# Altium PCB Pico_Audio_Lab.PcbDoc
Units mil, origin at the board's own origin, x right, y up, seen from the top; angles counter-clockwise.
Board outline 3937.01 x 3937.01 mil, 2 copper layers (Top Layer, Bottom Layer), stack 62.086 mil thick; 132 components, 99 nets, 405 pads, 66 vias.
Unrouted connection lines stored in the file: 46.
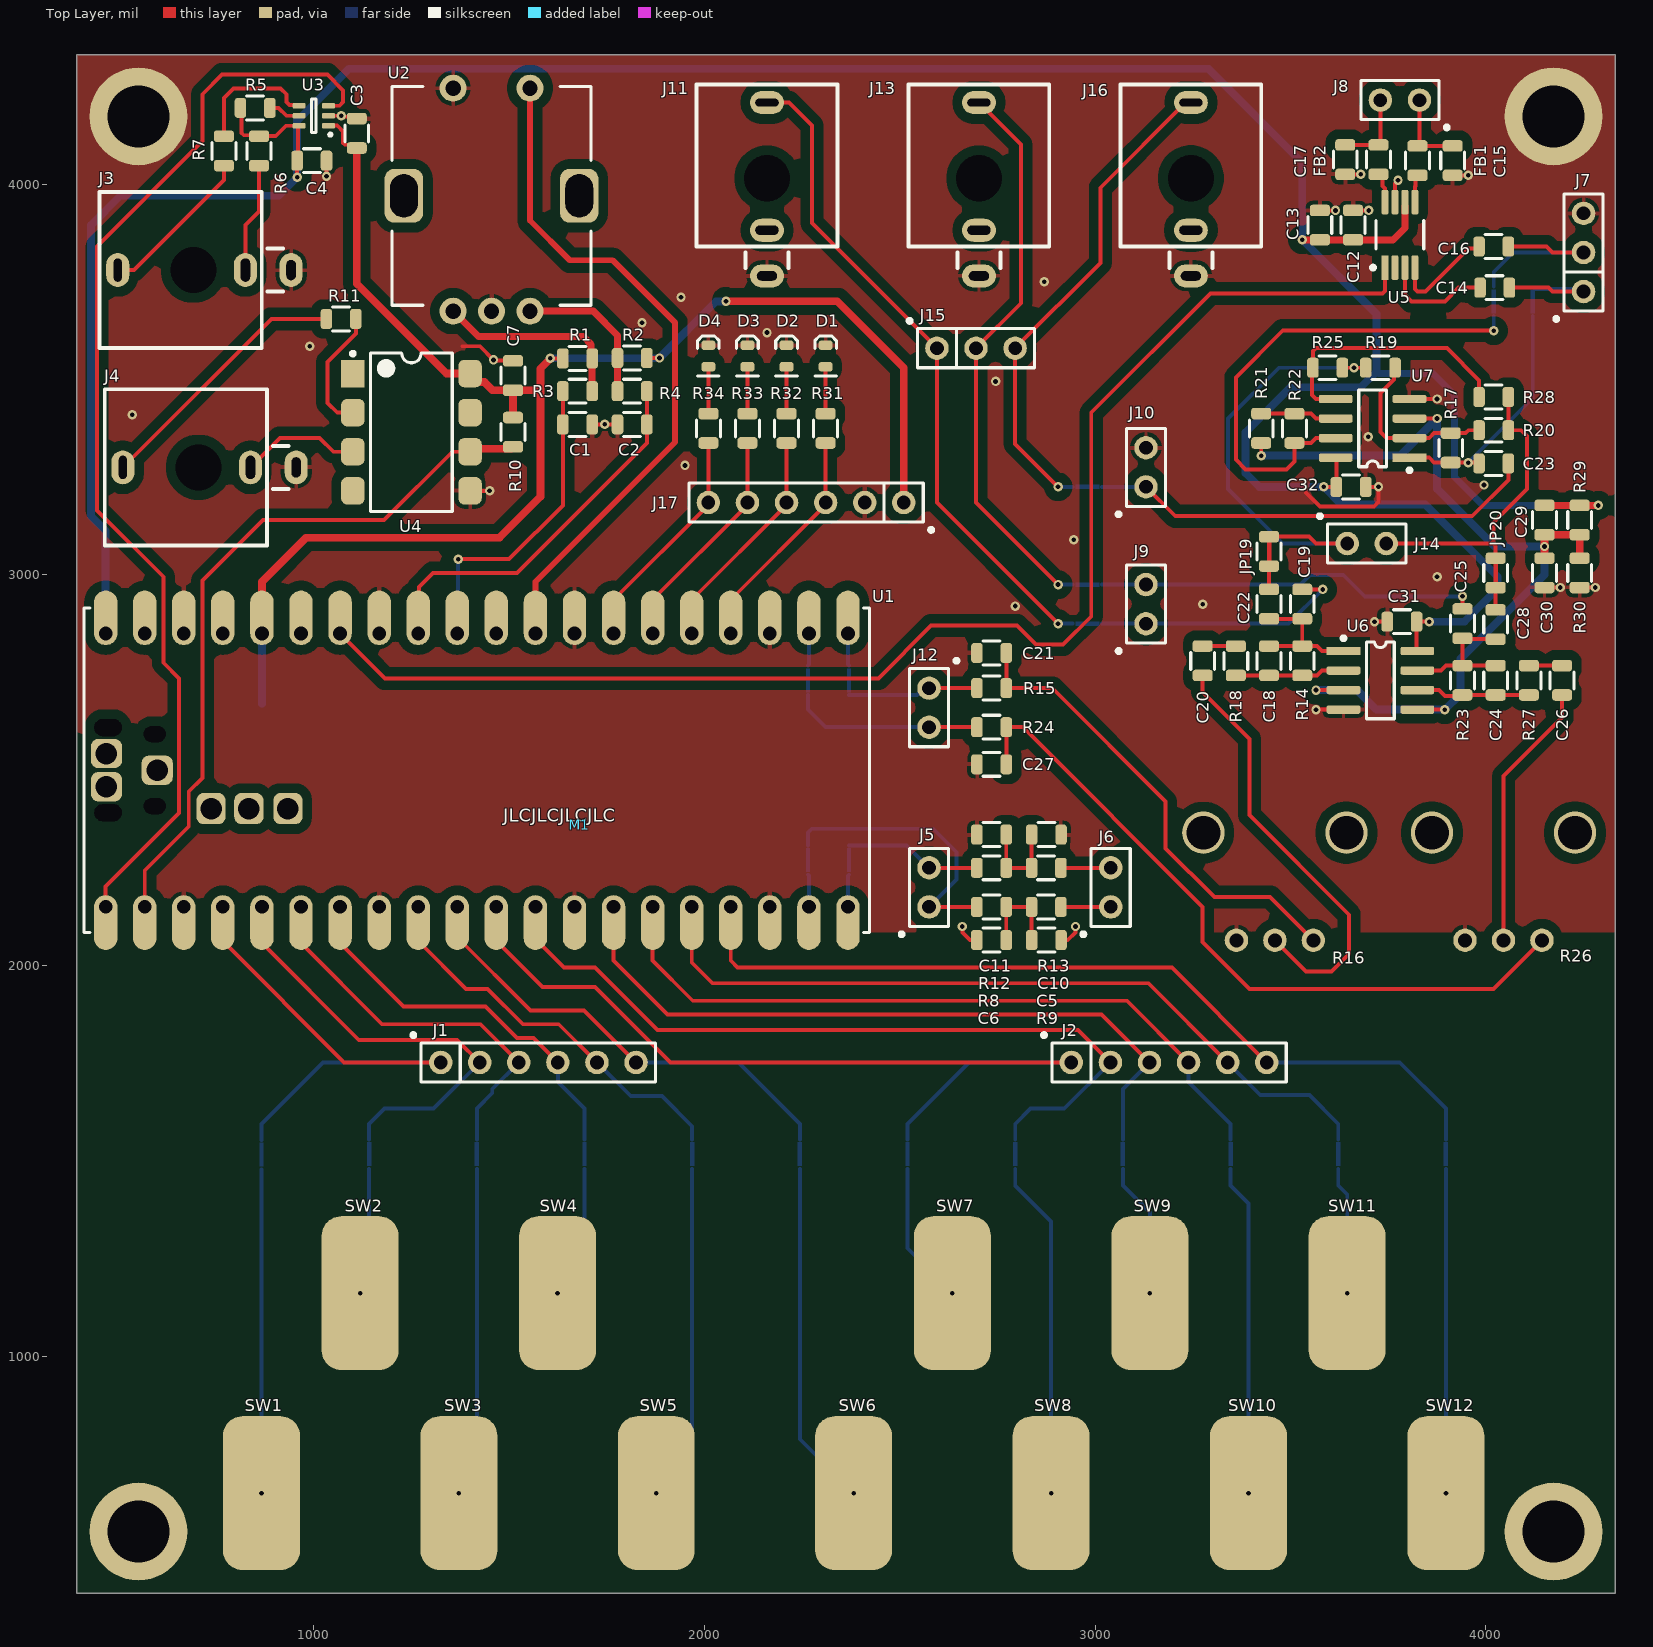
[diagram p0: Top Layer view]
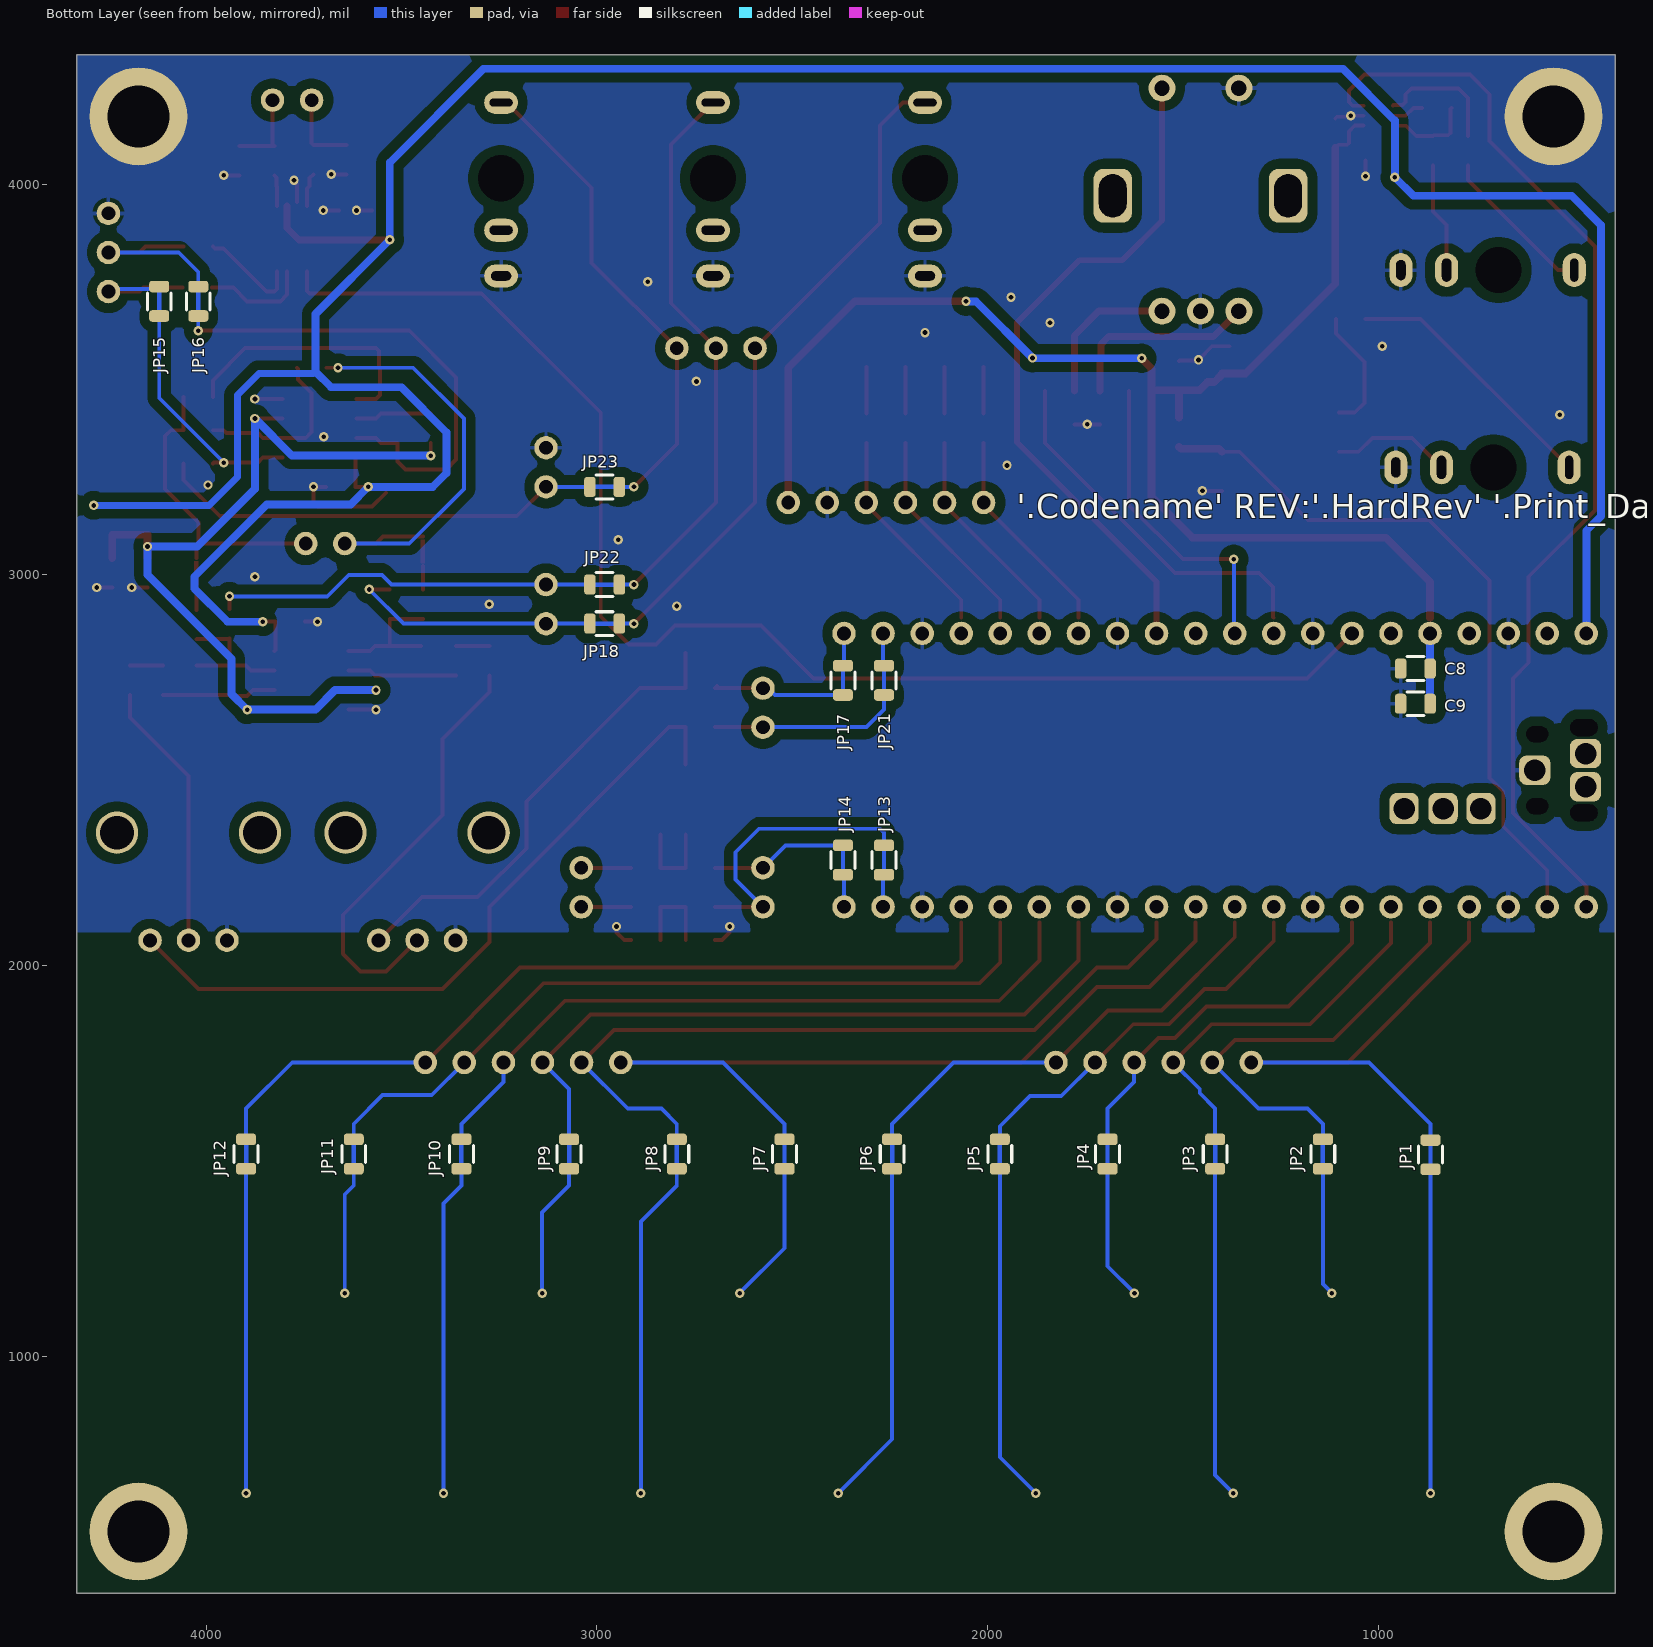
[diagram p1: Bottom Layer view, seen from below]

## Layer stack, top to bottom
Top Solder: solder mask 0.4, Solder Resist, Dk 3.5
Top Layer: signal copper 1.4
Dielectric 1: dielectric 59.2858, FR-4, Dk 4.8
Bottom Layer: signal copper 1.4
Bottom Solder: solder mask 0.4, Solder Resist, Dk 3.5

## Board outline
393.7,393.7 393.7,4330.71 4330.71,4330.71 4330.71,393.7

## Design rules (kind name [scope] priority, off if disabled: settings)
Clearance Clearance_HS [InDifferentialPairClass('DIFF90') vs InPoly] p1: gap=75 ignorepadtopadclearanceinfootprint=FALSE
Clearance Clearance_Poly [All vs InPoly] p2: gap=25 ignorepadtopadclearanceinfootprint=FALSE
Clearance [All] p3: gap=5 ignorepadtopadclearanceinfootprint=FALSE
DiffPairsRouting DIff90 [InDifferentialPairClass('DIFF90')] p1: maxlimit=10 minlimit=7 mostfreqgap=7 toplayer_minwidth=15 toplayer_maxwidth=25 toplayer_prefwidth=25 bottomlayer_minwidth=15 bottomlayer_maxwidth=25 bottomlayer_prefwidth=25 maxuncoupledlength=75
DiffPairsRouting [All] p2: maxlimit=10 minlimit=10 mostfreqgap=10 toplayer_minwidth=15 toplayer_maxwidth=15 toplayer_prefwidth=15 bottomlayer_minwidth=15 bottomlayer_maxwidth=15 bottomlayer_prefwidth=15 maxuncoupledlength=500
Height [All] p1: minheight=0 maxheight=35835.32 prefheight=0
HoleSize [All] p1: absolutevalues=TRUE maxlimit=99999 minlimit=1 maxpercent=80.000 minpercent=20.000
MinimumSolderMaskSliver [All] p1: minsoldermaskwidth=1.8
PolygonConnect [InAnyComponent] p1: thpad.connectstyle=Relief thpad.reliefconductorwidth=10 thpad.reliefentries=4 thpad.polygonreliefangle="90 Angle" thpad.airgapwidth=10 smdpad.connectstyle=Relief smdpad.reliefconductorwidth=10 smdpad.reliefentries=4 smdpad.polygonreliefangle="90 Angle" smdpad.airgapwidth=10 via.connectstyle=Direct via.reliefconductorwidth=10 via.reliefentries=4 via.polygonreliefangle="90 Angle" via.airgapwidth=10
PolygonConnect "Fall through" [All] p2: connectstyle=Direct reliefconductorwidth=10 reliefentries=4 polygonreliefangle="90 Angle" airgapwidth=10
RoutingVias [All] p1: holewidth=28 width=50 viastyle="Through Hole" minholewidth=28 minwidth=50 maxholewidth=28 maxwidth=50
SilkToSilkClearance [All] p1: silktosilkclearance=0
SilkToSolderMaskClearance [IsPad] p1: minsilkscreentomaskgap=0 clearancetoexposedcopper=TRUE
SolderMaskExpansion [All] p1: expansion=2 istentingtop=FALSE
Width [All] p1: maxlimit=300 minlimit=8 preferedwidth=10
24 further rules are at their usual default settings.

## Components (designator, comment, footprint, x,y, rotation, side; value= is the part's Value field where it differs from the comment)
C1 "10000pF" Chip0805 1675,3385 r180 top
C2 "10000pF" Chip0805 1815,3385 r0 top
C3 "0.1µF" Chip0805 1110,4130 r270 top
C4 "0.1µF" Chip0805 995,4060 r180 top
C5 "10µF" Chip0805 2874.72,2150 r0 top
C6 "0.033µF" Chip0805 2734.72,2065 r0 top
C7 "0.1µF" Chip0805 1510,3510 r270 top
C8 "0.1µF" Chip0805 905,2760 r180 bottom
C9 "10µF" Chip0805 905,2670 r180 bottom
C10 "10µF" Chip0805 2874.72,2250 r0 top
C11 "0.033µF" Chip0805 2734.72,2335 r0 top
C12 "1.0µF" Chip0805 3660,3895 r270 top
C13 "10µF" Chip0805 3575,3895 r270 top
C14 "0.1µF" Chip0805 4022.6,3735 r0 top
C15 "220pF" Chip0805 3915,4060 r90 top
C16 "0.1µF" Chip0805 4020,3840 r0 top
C17 "220pF" Chip0805 3640,4062.6 r90 top
C18 "10000pF" Chip0805 3445,2780 r270 top
C19 "0.1µF" Chip0805 3530,2925 r270 top
C20 "0.1µF" Chip0805 3275,2780 r270 top
C21 "0.033µF" Chip0805 2735,2800 r0 top
C22 "0.1µF" Chip0805 3445,2925 r270 top
C23 "0.1µF" Chip0805 4020,3285 r180 top
C24 "10000pF" Chip0805 4025,2730 r270 top
C25 "0.1µF" Chip0805 3940,2875 r270 top
C26 "0.1µF" Chip0805 4195,2730 r270 top
C27 "0.033µF" Chip0805 2735,2515 r0 top
C28 "0.1µF" Chip0805 4025,2872.6 r270 top
C29 "0.1µF" Chip0805 4150,3140 r270 top
C30 "0.1µF" Chip0805 4150,3005 r270 top
C31 "0.1µF" Chip0805 3785,2880 r180 top
C32 "0.1µF" Chip0805 3655,3225 r0 top
D1 "RED" LED0603 2310,3560 r90 top
D2 "RED" LED0603 2210,3560 r90 top
D3 "RED" LED0603 2110,3560 r90 top
D4 "RED" LED0603 2010,3560 r90 top
FB1 "FERRITE" Chip0805 3825,4060 r90 top
FB2 "FERRITE" Chip0805 3725,4062.6 r90 top
J1 "HEADER_1x6_NO_BOM" HEADER_1x6_100mil_NP 1574.8,1751.97 r0 top
J2 "HEADER_1x6_NO_BOM" HEADER_1x6_100mil_NP 3188.98,1751.97 r0 top
J3 "WQP-WQP419GR" PJ366ST 691.93,3780 r90 top
J4 "WQP-WQP419GR" PJ366ST 705,3275 r90 top
J5 "HEADER_1x2_NO_BOM" HEADER_1x2_100mil_NP 2574.72,2200 r90 top
J6 "HEADER_1x2_NO_BOM" HEADER_1x2_100mil_NP 3039.72,2200 r90 top
J7 "HEADER_1x3_NO_BOM" HEADER_1x3_100mil_NP 4250,3825 r90 top
J8 "HEADER_1x2_NO_BOM" HEADER_1x2_100mil_NP 3780,4215 r180 top
J9 "HEADER_1x2_NO_BOM" HEADER_1x2_100mil_NP 3130,2925 r90 top
J10 "HEADER_1x2_NO_BOM" HEADER_1x2_100mil_NP 3130,3275 r90 top
J11 "WQP-WQP518MA" PJ301M-12 2160,4015 r0 top
J12 "HEADER_1x2_NO_BOM" HEADER_1x2_100mil_NP 2574.72,2660 r270 top
J13 "WQP-WQP518MA" PJ301M-12 2702.5,4015 r0 top
J14 "HEADER_1x2_NO_BOM" HEADER_1x2_100mil_NP 3695,3080 r0 top
J15 "HEADER_1x3_NO_BOM" HEADER_1x3_100mil_NP 2695,3580 r0 top
J16 "WQP-WQP518MA" PJ301M-12 3245,4015 r0 top
J17 "HEADER_1x6_NO_BOM" HEADER_1x6_100mil_NP 2260,3185 r180 top
JP1 "JUMMPER_NC_0805" JUMMPER_NC_0805 866.14,1515.75 r270 bottom net-tie
JP2 "JUMMPER_NC_0805" JUMMPER_NC_0805 1141.73,1517.52 r270 bottom net-tie
JP3 "JUMMPER_NC_0805" JUMMPER_NC_0805 1417.32,1517.52 r270 bottom net-tie
JP4 "JUMMPER_NC_0805" JUMMPER_NC_0805 1692.91,1517.52 r270 bottom net-tie
JP5 "JUMMPER_NC_0805" JUMMPER_NC_0805 1968.5,1517.52 r270 bottom net-tie
JP6 "JUMMPER_NC_0805" JUMMPER_NC_0805 2244.09,1517.52 r270 bottom net-tie
JP7 "JUMMPER_NC_0805" JUMMPER_NC_0805 2519.68,1517.52 r270 bottom net-tie
JP8 "JUMMPER_NC_0805" JUMMPER_NC_0805 2795.28,1517.52 r270 bottom net-tie
JP9 "JUMMPER_NC_0805" JUMMPER_NC_0805 3070.87,1517.52 r270 bottom net-tie
JP10 "JUMMPER_NC_0805" JUMMPER_NC_0805 3346.46,1517.52 r270 bottom net-tie
JP11 "JUMMPER_NC_0805" JUMMPER_NC_0805 3622.05,1517.52 r270 bottom net-tie
JP12 "JUMMPER_NC_0805" JUMMPER_NC_0805 3897.64,1517.52 r270 bottom net-tie
JP13 "JUMMPER_NC_0805" JUMMPER_NC_0805 2265,2270 r90 bottom net-tie
JP14 "JUMMPER_NC_0805" JUMMPER_NC_0805 2370,2270 r90 bottom net-tie
JP15 "JUMMPER_NC_0805" JUMMPER_NC_0805 4120,3700 r90 bottom net-tie
JP16 "JUMMPER_NC_0805" JUMMPER_NC_0805 4020,3700 r90 bottom net-tie
JP17 "JUMMPER_NC_0805" JUMMPER_NC_0805 2370,2730 r270 bottom net-tie
JP18 "JUMMPER_NC_0805" JUMMPER_NC_0805 2980,2875 r180 bottom net-tie
JP19 "JUMMPER_NC_0805" JUMMPER_NC_0805 3445,3060 r90 top net-tie
JP20 "JUMMPER_NC_0805" JUMMPER_NC_0805 4025,3005 r90 top net-tie
JP21 "JUMMPER_NC_0805" JUMMPER_NC_0805 2265,2730 r270 bottom net-tie
JP22 "JUMMPER_NC_0805" JUMMPER_NC_0805 2980,2975 r180 bottom net-tie
JP23 "JUMMPER_NC_0805" JUMMPER_NC_0805 2980,3225 r180 bottom net-tie
M1 "JLC_NUMBER" JLC_NUMBER 1680,2360 r0 top
R1 "10k" Chip0805 1675.2,3553.9 r180 top
R2 "10k" Chip0805 1815,3555 r0 top
R3 "10k" Chip0805 1675,3470 r180 top
R4 "10k" Chip0805 1815,3470 r0 top
R5 "2.2k" Chip0805 850,4195 r180 top
R6 "220" Chip0805 860,4085 r90 top
R7 "220" Chip0805 770,4085 r270 top
R8 "270" Chip0805 2734.72,2150 r0 top
R9 "150" Chip0805 2875,2065 r180 top
R10 "2.2k" Chip0805 1510,3365 r90 top
R11 "220" Chip0805 1070,3655 r0 top
R12 "270" Chip0805 2734.72,2250 r0 top
R13 "150" Chip0805 2875,2335 r180 top
R14 "10k" Chip0805 3530,2780 r270 top
R15 "270" Chip0805 2735,2710 r0 top
R16 "100K" Alpha_RD901F-40-15R 3460,2340 r0 top
R17 "10k" Chip0805 3910,3325 r90 top
R18 "10k" Chip0805 3360,2780 r90 top
R19 "10k" Chip0805 3730,3530 r180 top
R20 "10k" Chip0805 4020,3370 r0 top
R21 "10k" Chip0805 3425,3375 r270 top
R22 "10k" Chip0805 3510,3375 r90 top
R23 "10k" Chip0805 3940,2730 r270 top
R24 "270" Chip0805 2735,2610 r0 top
R25 "10k" Chip0805 3595,3530 r0 top
R26 "100K" Alpha_RD901F-40-15R 4045,2340 r0 top
R27 "10k" Chip0805 4110,2730 r90 top
R28 "10k" Chip0805 4020,3455 r0 top
R29 "10k" Chip0805 4240,3140 r270 top
R30 "10k" Chip0805 4240,3005 r270 top
R31 "1k" Chip0805 2310,3375 r270 top
R32 "1k" Chip0805 2210,3375 r270 top
R33 "1k" Chip0805 2110,3375 r270 top
R34 "1k" Chip0805 2010,3375 r270 top
SW1 "TOUCH_PAD_NO_BOM" TENTED_PAD_5mil 866.14,649.61 r90 top
SW2 "TOUCH_PAD_NO_BOM" TENTED_PAD_5mil 1118.77,1161.42 r90 top
SW3 "TOUCH_PAD_NO_BOM" TENTED_PAD_5mil 1371.39,649.61 r90 top
SW4 "TOUCH_PAD_NO_BOM" TENTED_PAD_5mil 1624.02,1161.42 r90 top
SW5 "TOUCH_PAD_NO_BOM" TENTED_PAD_5mil 1876.64,649.61 r90 top
SW6 "TOUCH_PAD_NO_BOM" TENTED_PAD_5mil 2381.89,649.61 r90 top
SW7 "TOUCH_PAD_NO_BOM" TENTED_PAD_5mil 2634.51,1161.42 r90 top
SW8 "TOUCH_PAD_NO_BOM" TENTED_PAD_5mil 2887.14,649.61 r90 top
SW9 "TOUCH_PAD_NO_BOM" TENTED_PAD_5mil 3139.76,1161.42 r90 top
SW10 "TOUCH_PAD_NO_BOM" TENTED_PAD_5mil 3392.39,649.61 r90 top
SW11 "TOUCH_PAD_NO_BOM" TENTED_PAD_5mil 3645.01,1161.42 r90 top
SW12 "TOUCH_PAD_NO_BOM" TENTED_PAD_5mil 3897.64,649.61 r90 top
U1 "Raspberry Pi Pico" RASPBERRY_PI_PICO 1417.32,2500 r90 top
U2 "PEC11R-4020F-S0012" BOURNS_PEC11R-4020F-S 1455,3970 r0 top
U3 "TXU0101DCKR" 6-TSSOP 1000,4175 r180 top
U4 "6N138S" 6N13XS 1250,3365 r0 top
U5 "PAM8302AASCR" 8-MSOP 3780,3870 r90 top
U6 "TL072CDR" 8-SOIC 3730,2730 r0 top
U7 "TL072CDR" 8-SOIC 3710,3375 r180 top

## Footprints (in the part's own frame and the unit in brackets; to place one, negate y for a bottom-side part, rotate by r counter-clockwise, add the part's x,y. Pads: shape width x height; smd on the part's side, far side on the other; paste and mask are expansions set on the pad)
6-TSSOP [mm] "SOT23, 6-Leads, Body 2.00x2.10mm, Pitch 0.65mm, IPC Medium Density"
  rrect50% 0.85x0.35 smd: 1(-0.95,0.65) 2(-0.95,0) 3(-0.95,-0.65) 4(0.95,-0.65) 5(0.95,0) 6(0.95,0.65)
  silkscreen extent -1.17,-1.1 0.15,1.32, body extent -0.67,-1.1 0.67,1.1, height 1.1
6N13XS [mil]
  rect 60x70 smd: 1(-150,150)
  rrect50% 60x70 smd: 2(-150,50) 3(-150,-50) 4(-150,-150) 5(150,-150) 6(150,-50) 7(150,50) 8(150,150)
  silkscreen extent -155,-203 104,206, body extent -105,-205 105,200, height 138
8-MSOP [mm] "TSOP, 8-Leads, Body 3.00x3.00mm, Pitch 0.65mm, IPC Medium Density"
  rect 1.6x0.45 smd: 1(-2.125,0.975)
  rrect50% 1.6x0.45 smd: 2(-2.125,0.325) 3(-2.125,-0.325) 4(-2.125,-0.975) 5(2.125,-0.975) 6(2.125,-0.325) 7(2.125,0.325) 8(2.125,0.975)
  silkscreen extent -2.25,-1.55 0.92,1.87, body extent -2.51,-1.5 2.51,1.5, height 1
8-SOIC [mm] "SOIC, 8-Leads, Body 4.90x3.90mm, Pitch 1.27mm, IPC Medium Density"
  rect 2.2x0.55 smd: 1(-2.4,1.905)
  rrect50% 2.2x0.55 smd: 2(-2.4,0.635) 3(-2.4,-0.635) 4(-2.4,-1.905) 5(2.4,-1.905) 6(2.4,-0.635) 7(2.4,0.635) 8(2.4,1.905)
  silkscreen extent -2.52,-2.5 0.9,2.85, body extent -2,-2.5 2,2.5, height 1.75
Alpha_RD901F-40-15R [mm] "Alpha RD901F-40-15R series"
  round 1.524 hole 0.9: 1(-2.5,-7) 2(0,-7) 3(2.5,-7)
  round 2.75 hole 2.2: ""(-4.65,0) ""(4.65,0)
  body extent -4.88,-7.23 4.88,5.32, height 20.01
BOURNS_PEC11R-4020F-S [mm]
  round 1.75 hole 1: 1(-2.5,7) 2(2.5,7) A(-2.5,-7.5) B(2.5,-7.5) C(0,-7.5)
  rrect50% 2.5x3.5 hole 1.8 slot 2.8 at 90 deg: 3(-5.7,0) 4(5.7,0)
  silkscreen extent -6.48,-7.11 6.48,7.11, body extent -7,-7.7 7,7.2, height 26.62
Chip0805 [mm] "Chip Resistor, 2-Leads, Body 2.05x1.25mm, IPC Medium Density"
  rrect50% 0.75x1.3 smd: 1(-0.955,0) 2(0.955,0)
  silkscreen extent -0.55,-0.77 0.55,0.77, body extent -0.95,-0.55 0.95,0.55, height 0.5
HEADER_1x2_100mil_NP [mil]
  round 60 hole 35: 1(-50,0) 2(50,0)
  silkscreen extent -125,-50 100,75
HEADER_1x3_100mil_NP [mil]
  round 60 hole 35: 1(-100,0) 2(0,0) 3(100,0)
  silkscreen extent -175,-50 150,75
HEADER_1x6_100mil_NP [mil]
  round 60 hole 35: 1(-250,0) 2(-150,0) 3(-50,0) 4(50,0) 5(150,0) 6(250,0)
  silkscreen extent -325,-50 300,75
JLC_NUMBER [mil]
JUMMPER_NC_0805 [mm]
  rrect50% 0.75x1.3 smd: 1(-0.955,0) 2(0.955,0)
  Top Layer region: -0.762,-0.127 -0.762,0.127 0.762,0.127 0.762,-0.127
  silkscreen extent -0.55,-0.77 0.55,0.77
LED0603 [mm] "Chip LED, 2-Leads, Body 1.57x0.85mm, IPC Medium Density"
  rrect50% 0.6x0.9 smd: 1(-0.7,0) 2(0.7,0)
  silkscreen extent -1.3,-0.7 1.3,0.7, body extent -0.82,-0.37 0.83,0.36, height 0.68
PJ301M-12 [mm] "Moddeled after QingPu WQP-WQP518MA"
  round 0.025 hole 3 unplated: 0(0,0)
  oval 2.2x1.5 hole 0.6 slot 1.3 at 0 deg: 1(0,-6.35)
  oval 2.2x1.5 hole 0.6 slot 1.5 at 0 deg: 2(0,-3.38)
  oval 2.2x1.5 hole 0.5 slot 1.5 at 0 deg: 3(0,4.92)
  silkscreen extent -4.57,-5.84 4.57,6.1, body extent -4.5,-6.62 4.5,6.01, height 14.52
PJ366ST [mm] "Moddeled after QingPu WQP-WQP419GR"
  round 0.025 hole 3 unplated: 0(0,0)
  oval 2.2x1.5 hole 0.6 slot 1.3 at 0 deg: 1(0,-6.35)
  oval 2.2x1.5 hole 0.6 slot 1.5 at 0 deg: 2(0,-3.38)
  oval 2.2x1.5 hole 0.5 slot 1.5 at 0 deg: 3(0,4.92)
  silkscreen extent -5.08,-5.84 5.08,6.1, body extent -5,-6.73 5,6, height 15.52
RASPBERRY_PI_PICO [mil]
  round 5 hole 43.31 slot 70.87 at 90 deg unplated: 0(-108.9,943.82) 0(108.9,943.82)
  round 5 hole 41.34 slot 57.09 at 90 deg unplated: 0(-92.09,824.53) 0(92.09,824.53)
  oval 140x60 smd: 1(-390,950) 2(-390,850) 3(-390,750) 4(-390,650) 5(-390,550) 6(-390,450) 7(-390,350) 8(-390,250) 9(-390,150) 10(-390,50) 11(-390,-50) 12(-390,-150) 13(-390,-250) 14(-390,-350) 15(-390,-450) 16(-390,-550) 17(-390,-650) 18(-390,-750) 19(-390,-850) 20(-390,-950) 21(390,-950) 22(390,-850) 23(390,-750) 24(390,-650) 25(390,-550) 26(390,-450) 27(390,-350) 28(390,-250) 29(390,-150) 30(390,-50) 31(390,50) 32(390,150) 33(390,250) 34(390,350) 35(390,450) 36(390,550) 37(390,650) 38(390,750) 39(390,850) 40(390,950)
  round 60 hole 35: 1(-350,950) 2(-350,850) 3(-350,750) 4(-350,650) 5(-350,550) 6(-350,450) 7(-350,350) 8(-350,250) 9(-350,150) 10(-350,50) 11(-350,-50) 12(-350,-150) 13(-350,-250) 14(-350,-350) 15(-350,-450) 16(-350,-550) 17(-350,-650) 18(-350,-750) 19(-350,-850) 20(-350,-950) 21(350,-950) 22(350,-850) 23(350,-750) 24(350,-650) 25(350,-550) 26(350,-450) 27(350,-350) 28(350,-250) 29(350,-150) 30(350,-50) 31(350,50) 32(350,150) 33(350,250) 34(350,350) 35(350,450) 36(350,550) 37(350,650) 38(350,750) 39(350,850) 40(350,950)
  rrect50% 75x80 hole 55: TP1(0,818.11) TP2(42.5,948.03) TP3(-42.5,948.03)
  rrect50% 80x75 hole 55: TP4(-98.43,680.31) TP5(-98.43,583.46) TP6(-98.43,483.46)
  silkscreen extent -415,-1005 415,1005, body extent -413,-1005 413,1054, height 147
TENTED_PAD_5mil [mm]
  rrect50% 10x5 smd mask+0.102: 1(0,0)

## Part data
C1 C2 C18 C24: library part C2012X7R2E103M125AE, "CAP CER 10000PF 250V X7R 0805", Manufacturer="TDK Corporation", Operating Temperature="-55°C ~ 125°C", Package / Case="0805 (2012 Metric)", Ratings=-, Supplier Part Number 1=445-6805-1-ND, Temperature Coefficient=X7R, Tolerance=±20%, Voltage=250V, Applications="Boardflex Sensitive", Capacitance=10000pF, Features="Soft Termination", Height - Seated (Max)=-, HelpURL=http://product.tdk.com/capacitor/mlcc/en/documents/mlcc_commercial_soft_en.pdf, Lead Spacing=-, Lead Style=-, Manufacturer Part Number=C2012X7R2E103M125AE, Mounting Type="Surface Mount, MLCC", PartNumber=C2012X7R2E103M125AE, Series=C, Size / Dimension="0.079\" L x 0.049\" W (2.00mm x 1.25mm)", Supplier 1=Digi-Key, Supplier 2=Mouser, Thickness (Max)="0.057\" (1.45mm)"
C3 C4 C7 C8 C14 C16 C19 C20 C22 C23 C25 C26 C28 C29 C30 C31 C32: library part C2012X7T2E104K125AA, "CAP CER 0.1UF 250V 10% X7T 0805", Manufacturer="TDK Corporation", Operating Temperature="-55°C ~ 125°C", Package / Case="0805 (2012 Metric)", Ratings=-, Supplier Part Number 1=445-7749-1-ND, Temperature Coefficient=X7T, Tolerance=±10%, Voltage=250V, Applications="General Purpose", Capacitance=0.1µF, Features=-, Height - Seated (Max)=-, HelpURL=http://product.tdk.com/capacitor/mlcc/en/documents/mlcc_commercial_midvoltage_en.pdf, Lead Spacing=-, Lead Style=-, Manufacturer Part Number=C2012X7T2E104K125AA, Mounting Type="Surface Mount, MLCC", PartNumber=C2012X7T2E104K125AA, Series=C, Size / Dimension="0.079\" L x 0.049\" W (2.00mm x 1.25mm)", Supplier 1=Digi-Key, Supplier 2=Mouser, Thickness (Max)="0.057\" (1.45mm)"
C5 C9 C10 C13: library part C2012X5R1C106K125AC, "CAP CER 10UF 16V 10% X5R 0805", Manufacturer="TDK Corporation", Operating Temperature="-55°C ~ 85°C", Package / Case="0805 (2012 Metric)", Ratings=-, Supplier Part Number 1=445-7646-1-ND, Temperature Coefficient=X5R, Tolerance=±10%, Voltage=16V, Applications="General Purpose", Capacitance=10µF, Features=-, Height - Seated (Max)=-, HelpURL=http://product.tdk.com/capacitor/mlcc/en/documents/mlcc_commercial_general_en.pdf, Lead Spacing=-, Lead Style=-, Manufacturer Part Number=C2012X5R1C106K125AC, Mounting Type="Surface Mount, MLCC", PartNumber=C2012X5R1C106K125AC, Series=C, Size / Dimension="0.079\" L x 0.049\" W (2.00mm x 1.25mm)", Supplier 1=Digi-Key, Supplier 2=Mouser, Thickness (Max)="0.057\" (1.45mm)"
C6 C11 C21 C27: library part C2012C0G1H333J125AA, "CAP CER 0.033UF 50V 5% NP0 0805", Manufacturer="TDK Corporation", Operating Temperature="-55°C ~ 125°C", Package / Case="0805 (2012 Metric)", Ratings=-, Supplier Part Number 1=445-7523-1-ND, Temperature Coefficient="C0G, NP0", Tolerance=±5%, Voltage=50V, Applications="General Purpose", Capacitance=0.033µF, Features=-, Height - Seated (Max)=-, HelpURL=http://product.tdk.com/capacitor/mlcc/en/documents/mlcc_commercial_general_en.pdf, Lead Spacing=-, Lead Style=-, Manufacturer Part Number=C2012C0G1H333J125AA, Mounting Type="Surface Mount, MLCC", PartNumber=C2012C0G1H333J125AA, Series=C, Size / Dimension="0.079\" L x 0.049\" W (2.00mm x 1.25mm)", Supplier 1=Digi-Key, Supplier 2=Mouser, Thickness (Max)="0.057\" (1.45mm)"
C12: library part C2012X7R1H105M125AB, "CAP CER 1UF 50V 20% X7R 0805", Manufacturer="TDK Corporation", Operating Temperature="-55°C ~ 125°C", Package / Case="0805 (2012 Metric)", Ratings=-, Supplier Part Number 1=445-7548-1-ND, Temperature Coefficient=X7R, Tolerance=±20%, Voltage=50V, Applications="General Purpose", Capacitance=1.0µF, Features=-, Height - Seated (Max)=-, HelpURL=http://product.tdk.com/capacitor/mlcc/en/documents/mlcc_commercial_general_en.pdf, Lead Spacing=-, Lead Style=-, Manufacturer Part Number=C2012X7R1H105M125AB, Mounting Type="Surface Mount, MLCC", PartNumber=C2012X7R1H105M125AB, Series=C, Size / Dimension="0.079\" L x 0.049\" W (2.00mm x 1.25mm)", Supplier 1=Digi-Key, Supplier 2=Mouser, Thickness (Max)="0.057\" (1.45mm)"
C15 C17: library part C2012C0G2A221J, "CAP CER 220PF 100V 5% NP0 0805", Manufacturer="TDK Corporation", Operating Temperature="-55°C ~ 125°C", Package / Case="0805 (2012 Metric)", Ratings=-, Supplier Part Number 1=445-4133-1-ND, Temperature Coefficient="C0G, NP0", Tolerance=±5%, Voltage=100V, Applications="General Purpose", Capacitance=220pF, Features=-, Height - Seated (Max)=-, HelpURL=http://media.digikey.com/pdf/Data%20Sheets/TDK%20PDFs/C_Series_MidVoltage_B11.pdf, Lead Spacing=-, Lead Style=-, Manufacturer Part Number=C2012C0G2A221J, Mounting Type="Surface Mount, MLCC", PartNumber=C2012C0G2A221J, Series=C, Size / Dimension="0.079\" L x 0.049\" W (2.00mm x 1.25mm)", Supplier 1=Digi-Key, Supplier 2=Mouser, Thickness (Max)="0.030\" (0.75mm)"
D1 D2 D3 D4: library part LTST-C191KRKT, "LED SUPER RED CLR THIN 0603 SMD", Color=Red, Manufacturer="Lite-On Inc", Supplier Part Number 1=160-1447-1-ND, Datasheets=http://optoelectronics.liteon.com/upload/download/DS22-2000-223/S_110_LTST-C191KRKT.pdf, Manufacturer Part Number=LTST-C191KRKT, PartNumber=LTST-C191KRKT, Supplier 1=Digi-Key, Supplier 2=Mouser, Supplier Part Number 2=859-LTST-C191KRKT
FB1 FB2: library part 74279205, "FERRITE BEAD 1000 OHM .20A 0805", Current Rating=200mA, DC Resistance (DCR)="450 mOhm Max", Impedance @ Frequency="1 kOhm @ 100MHz", Manufacturer="Wurth Electronics Inc", Package / Case="0805 (2012 Metric)", Supplier Part Number 1=732-1606-1-ND, Filter Type="Differential Mode - Single", Height (Max)="0.043\" (1.10mm)", HelpURL=http://katalog.we-online.de/pbs/datasheet/74279205.pdf, Manufacturer Part Number=74279205, Mounting Type="Surface Mount", PartNumber=74279205, Series=WE-CBF, Size / Dimension="0.079\" L x 0.047\" W (2.00mm x 1.20mm)", Supplier 1=Digi-Key
J3 J4: "CONN 3.5mm VIRTICAL STEREO", Manufacturer=QingPu, Connector Type="Phone Jack", Gender=Female, HelpURL=http://www.qingpu-electronics.com/en/products/WQP-PJ366ST-364.html, Manufacturer Part Number=WQP-WQP419GR, PartNumber=WQP-WQP419GR, Signal Lines=Stereo, Supplier 1=QingPu, Supplier Part Number 1=WQP-WQP419GR
J11 J13 J16: "CONN 3.5mm VIRTICAL MONO w/ NORMAL", Manufacturer=QingPu, Connector Type="Phone Jack", Gender=Female, HelpURL=http://www.qingpu-electronics.com/en/products/WQP-PJ398SM-362.html, Manufacturer Part Number=WQP-WQP518MA, PartNumber=WQP-WQP518MA, Signal Lines=Mono, Supplier 1=QingPu, Supplier Part Number 1=WQP-WQP518MA
M1: "JLC Order Number Location", Manufacturer Part Number=JLC_NUMBER, PartNumber=JLC_NUMBER
R1 R2 R3 R4 R14 R17 R18 R19 R20 R21 R22 R23 R25 R27 R28 R29 R30: library part CRCW080510K0FKEA, "RES 10.0K OHM 1/8W 1% 0805 SMD", Manufacturer="Vishay Dale", Package / Case="0805 (2012 Metric)", Power (Watts)="0.125W, 1/8W", Supplier Part Number 1=541-10.0KCCT-ND, Temperature Coefficient=±100ppm/°C, Tolerance=±1%, Composition="Thick Film", Features="Automotive AEC-Q200 Qualified", Height="0.020\" (0.50mm)", HelpURL=http://www.vishay.com/doc?20035, Manufacturer Part Number=CRCW080510K0FKEA, Number of Terminations=2, PartNumber=CRCW080510K0FKEA, Resistance=10k, Series=CRCW, Size / Dimension="0.079\" L x 0.049\" W (2.00mm x 1.25mm)", Supplier 1=Digi-Key, Supplier 2=Mouser, Supplier Device Package="0805 (2012 Metric)"
R5 R10: library part CRCW08052K20FKEA, "RES 2.20K OHM 1/8W 1% 0805 SMD", Manufacturer="Vishay Dale", Package / Case="0805 (2012 Metric)", Power (Watts)="0.125W, 1/8W", Supplier Part Number 1=541-2.20KCCT-ND, Temperature Coefficient=±100ppm/°C, Tolerance=±1%, Composition="Thick Film", Features="Automotive AEC-Q200 Qualified", Height="0.020\" (0.50mm)", HelpURL=http://www.vishay.com/doc?20035, Manufacturer Part Number=CRCW08052K20FKEA, Number of Terminations=2, PartNumber=CRCW08052K20FKEA, Resistance=2.2k, Series=CRCW, Size / Dimension="0.079\" L x 0.049\" W (2.00mm x 1.25mm)", Supplier 1=Digi-Key, Supplier 2=Mouser, Supplier Device Package="0805 (2012 Metric)"
R6 R7 R11: library part CRCW0805220RFKEA, "RES 220 OHM 1/8W 1% 0805 SMD", Manufacturer="Vishay Dale", Package / Case="0805 (2012 Metric)", Power (Watts)="0.125W, 1/8W", Supplier Part Number 1=541-220CCT-ND, Temperature Coefficient=±100ppm/°C, Tolerance=±1%, Composition="Thick Film", Features="Automotive AEC-Q200 Qualified", Height="0.020\" (0.50mm)", HelpURL=http://www.vishay.com/doc?20035, Manufacturer Part Number=CRCW0805220RFKEA, Number of Terminations=2, PartNumber=CRCW0805220RFKEA, Resistance=220, Series=CRCW, Size / Dimension="0.079\" L x 0.049\" W (2.00mm x 1.25mm)", Supplier 1=Digi-Key, Supplier 2=Mouser, Supplier Device Package="0805 (2012 Metric)"
R8 R12 R15 R24: library part CRCW0805270RFKEA, "RES 270 OHM 1/8W 1% 0805 SMD", Manufacturer="Vishay Dale", Package / Case="0805 (2012 Metric)", Power (Watts)="0.125W, 1/8W", Supplier Part Number 1=541-270CCT-ND, Temperature Coefficient=±100ppm/°C, Tolerance=±1%, Composition="Thick Film", Features="Automotive AEC-Q200 Qualified", Height="0.020\" (0.50mm)", HelpURL=http://www.vishay.com/doc?20035, Manufacturer Part Number=CRCW0805270RFKEA, Number of Terminations=2, PartNumber=CRCW0805270RFKEA, Resistance=270, Series=CRCW, Size / Dimension="0.079\" L x 0.049\" W (2.00mm x 1.25mm)", Supplier 1=Digi-Key, Supplier 2=Mouser, Supplier Device Package="0805 (2012 Metric)"
R9 R13: library part CRCW0805150RFKEA, "RES 150 OHM 1/8W 1% 0805 SMD", Manufacturer="Vishay Dale", Package / Case="0805 (2012 Metric)", Power (Watts)="0.125W, 1/8W", Supplier Part Number 1=541-150CCT-ND, Temperature Coefficient=±100ppm/°C, Tolerance=±1%, Composition="Thick Film", Features="Automotive AEC-Q200 Qualified", Height="0.020\" (0.50mm)", HelpURL=http://www.vishay.com/doc?20035, Manufacturer Part Number=CRCW0805150RFKEA, Number of Terminations=2, PartNumber=CRCW0805150RFKEA, Resistance=150, Series=CRCW, Size / Dimension="0.079\" L x 0.049\" W (2.00mm x 1.25mm)", Supplier 1=Digi-Key, Supplier 2=Mouser, Supplier Device Package="0805 (2012 Metric)"
R16 R26: library part RD901F-40-15R-B100K, "POT 100K OHM 9MM RD 1/20W", Manufacturer="Alpha (Taiwan)", Power (Watts)="0.05W, 1/20W", Resistive Material=Carbon, Supplier Part Number 1=1012A, Actuator Diameter="0.250\" (6.35mm)", Actuator Type="Round Shaft", Adjustment Type="Top Adjustment", HelpURL=http://www.taiwanalpha.com.tw/english2014/p_e_022.htm, Manufacturer Part Number=RD901F-40-15R-B100K, Mounting Type="Through Hole", Number of Turns=1, PartNumber=RD901F-40-15R-B100K, Resistance=100K, Series=RD901F-40-15R, Supplier 1="Small Bear Electronics", Taper=Linear, Termination Style="PCB Pins"
R31 R32 R33 R34: library part CRCW08051K00FKEA, "RES 1.00K OHM 1/8W 1% 0805 SMD", Manufacturer="Vishay Dale", Package / Case="0805 (2012 Metric)", Power (Watts)="0.125W, 1/8W", Supplier Part Number 1=541-1.00KCCT-ND, Temperature Coefficient=±100ppm/°C, Tolerance=±1%, Composition="Thick Film", Features="Automotive AEC-Q200 Qualified", Height="0.020\" (0.50mm)", HelpURL=http://www.vishay.com/doc?20035, Manufacturer Part Number=CRCW08051K00FKEA, Number of Terminations=2, PartNumber=CRCW08051K00FKEA, Resistance=1k, Series=CRCW, Size / Dimension="0.079\" L x 0.049\" W (2.00mm x 1.25mm)", Supplier 1=Digi-Key, Supplier 2=Mouser, Supplier Device Package="0805 (2012 Metric)"
U1: "RASPBERRY PI PICO RP2040 BOARD", Manufacturer="Raspberry Pi", Manufacturer Part Number=SC0915, Supplier Part Number 1=2648-SC0915CT-ND, PartNumber="Raspberry Pi Pico", Supplier 1=Digi-Key
U2: "ROTARY ENCODER MECHANICAL 12PPR", Manufacturer="Bourns Inc.", Supplier Part Number 1=PEC11R-4020F-S0012-ND, Datasheets=https://www.bourns.com/docs/Product-Datasheets/PEC11R.pdf, Manufacturer Part Number=PEC11R-4020F-S0012, PartNumber=PEC11R-4020F-S0012, Supplier 1=Digi-Key, Supplier 2=Mouser, Supplier Part Number 2=652-PEC11R-4020F-S12
U3: "SINGLE CHANNEL FIXED-DIRECTION L", Manufacturer="Texas Instruments", Supplier Part Number 1=296-TXU0101DCKRCT-ND, HelpURL=https://www.ti.com/lit/ds/symlink/txu0101.pdf, Manufacturer Part Number=TXU0101DCKR, PartNumber=TXU0101DCKR, Supplier 1=Digi-Key, Supplier 2=Mouser, Supplier Part Number 2=595-TXU0101DCKR
U4: "OPTOISO 5KV DARL W/BASE 8SMD", Manufacturer="Lite-On Inc.", Supplier Part Number 1=160-1797-ND, HelpURL=https://media.digikey.com/pdf/Data%20Sheets/Lite-On%20PDFs/6N138-39%20Series.pdf, Manufacturer Part Number=6N138S, PartNumber=6N138S, Supplier 1=Digi-Key, Supplier 2=Mouser, Supplier Part Number 2=859-6N138S
U5: "IC AMP CLASS D MONO 2.5W 8MSOP", Manufacturer="Diodes Incorporated", Supplier Part Number 1=PAM8302AASCRDICT-ND, HelpURL=https://www.diodes.com/assets/Datasheets/PAM8302A.pdf, Manufacturer Part Number=PAM8302AASCR, PartNumber=PAM8302AASCR, Supplier 1=Digi-Key, Supplier 2=Mouser, Supplier Part Number 2=621-PAM8302AASCR
U6 U7: "IC OPAMP JFET 3MHZ 8SOIC", Manufacturer="Texas Instruments", Supplier Part Number 1=296-1282-1-ND, HelpURL=http://www.ti.com/lit/ds/symlink/tl071a.pdf, Manufacturer Part Number=TL072CDR, PartNumber=TL072CDR, Supplier 1=Digi-Key, Supplier 2=Mouser, Supplier Part Number 2=595-TL072CDR
J1 J2 J17: Manufacturer Part Number=HEADER_1x6_NO_BOM, PartNumber=HEADER_1x6_NO_BOM
J5 J6 J8 J9 J10 J12 J14: Manufacturer Part Number=HEADER_1x2_NO_BOM, PartNumber=HEADER_1x2_NO_BOM
J7 J15: Manufacturer Part Number=HEADER_1x3_NO_BOM, PartNumber=HEADER_1x3_NO_BOM
JP1 JP2 JP3 JP4 JP5 JP6 JP7 JP8 JP9 JP10 JP11 JP12 JP13 JP14 JP15 JP16 JP17 JP18 JP19 JP20 JP21 JP22 JP23: Manufacturer Part Number=JUMMPER_NC_0805, PartNumber=JUMMPER_NC_0805
SW1 SW2 SW3 SW4 SW5 SW6 SW7 SW8 SW9 SW10 SW11 SW12: Manufacturer Part Number=TOUCH_PAD_NO_BOM, PartNumber=TOUCH_PAD_NO_BOM

## Free pads (board coordinates)
  round 250 hole 158: ""(551.18,551.18) ""(551.18,4173.23) ""(4173.23,551.18) ""(4173.23,4173.23)

## Via types
v1: diameter 24, hole 12, Top Layer to Bottom Layer, tented both sides, 66 vias

## Nets (pads, with @x,y where several pads share a name; then routed paths per layer and width w, separated by ;. In a path a pad name is that pad's centre, name@x,y a point inside that pad or via, vN(x,y) a via of type N, cw(c..) or ccw(c..) an arc to the next point about the centre after c; other vN are vias at no path point)
3.3V: C3.2 C7.2 C8.2 C9.2 J17.1 R1.2 R2.2 R10.2 U1.36 U3.1 U4.8 | length 4001.9
  Top Layer w10: U3.1 1037.99,4150 1060,4150 1075,4135 1075,4105 1079.31,4100.69 1101.71,4100.69 C3.2 ; v1(1605.2,3553.9) R1.2 ; R2.2 v1(1885,3555)
  Top Layer w20: U1.36@867.32,2890 867.32,2982.32 980,3095 1475,3095 1580,3200 1580,3475 ; C3.2 1110,3745 1340,3515 U4.8 1400,3512.71 1419.62,3493.09 1436.91,3493.09 1457.6,3472.4 C7.2 ; R10.2 C7.2 ; v1(1605.2,3553.9) 1605.2,3552.82 1580,3527.62 1580,3475 ; v1(2055,3700) 2340,3700 2510,3530 J17.1 ; C7.2 1577.4,3472.4 1580,3475
  Bottom Layer w20: U1.36@867.32,2850 867.36,2849.96 C9.2 C9.2 ; v1(1605.2,3553.9) 1605.75,3554.45 1884.45,3554.45 v1(1885,3555) 2029.23,3699.23 2054.23,3699.23 v1(2055,3700)
ADC_VREF: U1.35
AMP_IN_N: JP16.1 R22.1 U7.7 | length 1283.9
  Top Layer w10: U7.7 3565,3350 3552.4,3337.4 R22.1 3510,3290 3490,3270 3385,3270 3360,3295 3360,3505 3480,3625 v1(4020,3625)
  Bottom Layer w10: v1(4020,3625) JP16.1
AMP_IN_P: C23.2 JP15.1 R17.1 U7.1 | length 627.8
  Top Layer w10: U7.1 3855,3300 3867.6,3287.4 R17.1 3980,3287.4 C23.2
  Bottom Layer w10: v1(3954.83,3287.15) 4120,3452.32 JP15.1
AUDIO_1: JP13.1 U1.19 | length 83.4
  Bottom Layer w10: JP13.1 2267.32,2230.08 U1.19@2267.32,2150
AUDIO_2: JP14.1 U1.20 | length 83.5
  Bottom Layer w10: U1.20@2367.32,2150 2367.32,2229.72 JP14.1
AUDIO_3: JP17.1 U1.21 | length 83.5
  Bottom Layer w10: U1.21@2367.32,2850 2367.32,2770.28 JP17.1
AUDIO_3_MIX_B: J14.1 JP19.2 R19.2 R25.2 | length 1186.4
  Top Layer w10: JP19.2 3547.4,3097.6 3565,3080 J14.1 ; R25.2 v1(3662.5,3530) R19.2
  Bottom Layer w10: J14.1 3480,3080 3340,3220 3340,3400 3470,3530 v1(3662.5,3530)
AUDIO_3_VOL_A: C19.1 J9.1 JP18.1 | length 653.5
  Top Layer w10: C19.1 v1(3582.4,2962.6)
  Bottom Layer w10: JP18.1 J9.1 3494.8,2875 v1(3582.4,2962.6)
AUDIO_3_VOL_B: C22.1 JP19.1 | length 59.8
  Top Layer w10: C22.1 JP19.1
AUDIO_4: JP21.1 U1.22 | length 83.4
  Bottom Layer w10: JP21.1 2267.32,2769.92 U1.22@2267.32,2850
AUDIO_4_MIX_B: J14.2 JP20.2 R20.2 R28.2 | length 763.1
  Top Layer w10: J14.2 4019.14,3080 ; JP20.2 4025,3074.14 4019.14,3080 ; R28.2 R20.2 4090,3370 4105,3355 4105,3220 4019.14,3134.14 4019.14,3080
AUDIO_4_VOL_A: C25.1 J9.2 JP22.1 | length 987.9
  Top Layer w10: C25.1 v1(3940,2945)
  Bottom Layer w10: JP22.1 J9.2 3525,2975 3550,3000 3635,3000 3690,2945 v1(3940,2945)
AUDIO_4_VOL_B: C28.1 JP20.1 | length 57.2
  Top Layer w10: C28.1 JP20.1
AUDIO_MIX_OUT: C23.1 J10.1 JP23.1 | length 1151.8
  Top Layer w10: J10.1 3205,3150 3965,3150 4057.6,3242.6 C23.1
  Bottom Layer w10: JP23.1 J10.1
ENC_A: C1.2 R3.2 U1.31 | length 808
  Top Layer w10: v1(1370,3040) 1500,3040 1637.4,3177.4 C1.2 R3.2
  Bottom Layer w10: U1.31@1367.32,2850 1368.66,2851.34 1368.66,3038.66 v1(1370,3040)
ENC_B: C2.2 R4.2 U1.32 | length 948.4
  Top Layer w10: U1.32@1267.32,2890 1269.14,2891.82 1269.14,2969.14 1305,3005 1520,3005 1852.6,3337.6 C2.2 R4.2
ENC_SW: U1.29 U2.2 | length 1762.1
  Top Layer w15: U2.2 1553.43,3906.57 1655,3805 1765,3805 1925,3645 1925,3340 1567.32,2982.32 1567.32,2890 U1.29@1567.32,2850
GND: C1.1 C2.1 C3.1 C4.1 C6.1 C7.1 C8.1 C9.1 C11.1 C12.1 C13.1 C15.1 C17.1 C21.1 C27.1 C30.2 C31.2 C32.2 D1.2 D2.2 D3.2 D4.2 J3.1 J4.1 J7.3 J10.2 J11.1 J13.1 J16.1 J17.2 pad.@551.18,4173.23 pad.@4173.23,4173.23 R9.1 R13.1 R16.1 R26.1 R30.2 U1.3 U1.8 U1.13 U1.18 U1.23 U1.28 U1.33 U1.38 U1.TP1 U2.1 U2.C U3.2 U4.5 U5.7 U6.4 U7.4 | length 1244.8
  Top Layer w10: v1(1032.6,4020) C4.1 ; U3.2 v1(1070,4175) 1072.68,4172.32 1105.28,4172.32 C3.1 ; 1380,3585 1425,3585 v1(1460,3550) 1461.2,3548.8 1508.8,3548.8 C7.1 ; U4.5 v1(1450,3215) ; C1.1 C2.1 ; v1(2660,2100) 2660,2085 2680,2065 C6.1 ; R9.1 2929.72,2065 2949.72,2085 v1(2949.72,2100) ; 3540,3210 3575,3175 3713.3,3175 3725,3186.7 v1(3725,3225) C32.2 ; v1(3565,2655) U6.4 ; C13.1 v1(3615,3932.6) ; C17.1 v1(3680,4025) ; C12.1 v1(3700,3932.6) ; v1(3715,2880) C31.2 ; U5.7 3767.2,4002.2 v1(3775,4010) ; U7.4 v1(3875,3450) ; C15.1 v1(3955,4022.4) ; C30.2 v1(4190,2967.4) ; R30.2 v1(4280,2967.4)
  other v1: 2795,2920 3275,2925 3875,2995 2945,3090 3995,3230 1950,3280 3699.08,3353.13 1745,3385 535,3410 2745,3495 990,3585 2160,3620 1840,3645 1940,3710 2870,3750
GP18: J17.3 R31.2 U1.24 | length 547.9
  Top Layer w10: U1.24@2067.32,2890 2067.32,2936.16 2310,3178.84 J17.3 R31.2
GP19: J17.4 R32.2 U1.25 | length 547.9
  Top Layer w10: U1.25@1967.32,2890 1967.32,2936.16 2210,3178.84 J17.4 R32.2
GP20: J17.5 R33.2 U1.26 | length 547.9
  Top Layer w10: U1.26@1867.32,2890 1867.32,2936.16 2110,3178.84 J17.5 R33.2
GP21: J17.6 R34.2 U1.27 | length 547.9
  Top Layer w10: U1.27@1767.32,2890 1767.32,2936.16 2010,3178.84 J17.6 R34.2
MIDI_RX: R10.1 U1.2 U4.6 | length 1833
  Top Layer w10: U1.2@567.32,2150 567.32,2242.93 680,2355.6 680,2445 715,2480 715,2985 870,3140 1180,3140 1355,3315 U4.6
  Top Layer w20: U4.6 1407.64,3322.64 1505.24,3322.64 R10.1
MIDI_TX: U1.1 U3.3 | length 2825.3
  Top Layer w10: U1.1@467.32,2150 467.32,2202.32 655,2390 655,2735 615,2775 615,2995 445,3165 445,3840 715,4110 715,4230 765,4280 1035,4280 1075,4240 1075,4210 1065.59,4200.59 U3.3
NetC5_1: C5.1 C6.2 R8.2 R9.2 | length 234.9
  Top Layer w10: C6.2 R8.2 C5.1 2837.26,2149.86 2837.26,2065.14 R9.2
NetC5_2: C5.2 J6.1 | length 127.4
  Top Layer w10: C5.2 J6.1
NetC10_1: C10.1 C11.2 R12.2 R13.2 | length 234.9
  Top Layer w10: C11.2 R12.2 C10.1 2837.26,2250.14 2837.26,2334.86 R13.2
NetC10_2: C10.2 J6.2 | length 127.4
  Top Layer w10: C10.2 J6.2
NetC14_1: C14.1 U5.3 | length 273
  Top Layer w10: U5.3@3792.8,3776.34 3792.8,3717.2 3810,3700 3895,3700 3930,3735 C14.1
NetC14_2: C14.2 J7.1 JP15.2 | length 320.3
  Top Layer w10: C14.2 4160,3735 4170,3725 J7.1
  Bottom Layer w10: JP15.2@4126.3,3731.3 4243.7,3731.3 J7.1
NetC15_2: C15.2 FB1.2 J8.1 | length 209.5
  Top Layer w10: J8.1 3830,4102.6 FB1.2 C15.2
NetC16_1: C16.1 U5.4 | length 259.1
  Top Layer w10: U5.4@3818.39,3776.34 3818.39,3731.61 3825,3725 3845,3725 3955,3835 3977.4,3835 C16.1
NetC16_2: C16.2 J7.2 JP16.2 | length 486.7
  Top Layer w10: C16.2 4155,3840 4170,3825 J7.2
  Bottom Layer w10: JP16.2 4020,3775 4070,3825 J7.2
NetC17_2: C17.2 FB2.2 J8.2 | length 201.9
  Top Layer w10: C17.2 FB2.2 3730,4105.2 J8.2
NetC18_1: C18.1 C19.2 C22.2 R14.1 U6.1 | length 345.5
  Top Layer w10: C22.2 C19.2 R14.1 ; C18.1@3450,2817.6 R14.1 ; U6.1 3580,2805 3567.4,2817.6 R14.1
NetC18_2: C18.2 R14.2 R18.1 U6.2 | length 280.7
  Top Layer w10: R18.1 C18.2 R14.2 3567.4,2742.4 3580,2755 U6.2
NetC20_1: C20.1 R18.2 | length 85
  Top Layer w10: C20.1 R18.2
NetC20_2: C20.2 R16.2 | length 1109.3
  Top Layer w10: C20.2 3275,2700 3395,2580 3395,2385 3650,2130 3650,2030 3605,1985 3539.41,1985 R16.2
NetC21_2: C21.2 R15.2 R16.3 | length 1213.5
  Top Layer w10: C21.2 R15.2 2890,2710 3180,2420 3180,2300 3305,2175 3447.83,2175 R16.3
NetC24_1: C24.1 C25.2 C28.2 R23.1 U6.7 | length 361.5
  Top Layer w10: U6.7 3885,2755 3897.6,2767.6 R23.1 ; C24.1 R23.1 ; C28.2 4023.8,2836.2 3941.2,2836.2 C25.2 R23.1
NetC24_2: C24.2 R23.2 R27.1 U6.6 | length 292.7
  Top Layer w10: U6.6 3880,2705 3895,2690 3937.6,2690 R23.2 C24.2 R27.1
NetC26_1: C26.1 R27.2 | length 85
  Top Layer w10: R27.2 C26.1
NetC26_2: C26.2 R26.2 | length 690.1
  Top Layer w10: R26.2 4045,2485 4195,2635 C26.2
NetC27_2: C27.2 R24.2 R26.3 | length 1847.6
  Top Layer w10: C27.2 R24.2 2815,2610 3275,2150 3275,2060 3395,1940 4019.02,1940 R26.3
NetD1_1: D1.1 R31.1 | length 119.8
  Top Layer w10: R31.1 D1.1
NetD2_1: D2.1 R32.1 | length 119.8
  Top Layer w10: R32.1 D2.1
NetD3_1: D3.1 R33.1 | length 119.8
  Top Layer w10: R33.1 D3.1
NetD4_1: D4.1 R34.1 | length 119.8
  Top Layer w10: R34.1 D4.1
NetFB1_1: FB1.1 U5.5 | length 81.5
  Top Layer w10: U5.5@3818.39,3943.66 3818.39,3993.39 3820,3995 3820,4017.4 FB1.1
NetFB2_1: FB2.1 U5.8 | length 88.5
  Top Layer w10: FB2.1 3725.42,4025 3735,4015.42 3735,3995 3741.61,3988.39 U5.8@3741.61,3943.66
NetJ3_2: J3.2 R6.1 | length 281.9
  Top Layer w10: J3.2 825,3895 860,3930 R6.1
NetJ3_3: J3.3 R7.2 | length 404.4
  Top Layer w10: J3.3 540,3780 770,4010 R7.2
NetJ4_2: J4.2 U4.3 | length 307.8
  Top Layer w10: J4.2 838.07,3275.51 860.73,3298.17 861.24,3298.17 913.07,3350 1015,3350 1050,3315 U4.3
NetJ4_3: J4.3 R11.1 | length 678.8
  Top Layer w10: J4.3 511.3,3275.51 539.17,3303.38 539.67,3303.38 891.3,3655 R11.1
NetJ5_1: J5.1 JP13.2 R8.1 | length 732.9
  Top Layer w10: J5.1 R8.1
  Bottom Layer w10: JP13.2 2265,2340 2275,2350 2585,2350 2645,2290 2645,2220.28 J5.1
NetJ5_2: J5.2 JP14.2 R12.1 | length 351
  Top Layer w10: J5.2 R12.1
  Bottom Layer w10: JP14.2 2517.13,2307.6 J5.2
NetJ11_3: J11.3 J15.1 JP18.2 | length 1712.7
  Top Layer w10: J11.3 2216.3,4208.7 2275,4150 2275,3900 J15.1 2595,3185 v1(2905,2875)
  Bottom Layer w10: v1(2905,2875) JP18.2
NetJ12_1: J12.1 JP17.2 R15.1 | length 341.8
  Top Layer w10: J12.1 R15.1 R15.1@2692.4,2715
  Bottom Layer w10: JP17.2 2543.6,2692.4 2561.19,2710 J12.1
NetJ12_2: J12.2 JP21.2 R24.1 | length 488.4
  Top Layer w10: J12.2 R24.1
  Bottom Layer w10: JP21.2 2265,2655 2310,2610 J12.2
NetJ13_3: J13.3 J15.2 JP22.2 | length 1450.5
  Top Layer w10: J13.3 2703.01,4208.7 2725.67,4186.04 2725.67,4185.54 2810,4101.2 2810,3695 J15.2 2695,3185 v1(2905,2975)
  Bottom Layer w10: v1(2905,2975) JP22.2
NetJ15_3: J15.3 J16.3 JP23.2 | length 1261.1
  Top Layer w10: v1(2905,3225) 2795,3335 J15.3 3013.2,3798.2 3013.2,3990.68 3231.22,4208.7 J16.3
  Bottom Layer w10: v1(2905,3225) JP23.2
NetJP1_2: JP1.2 SW1.1 | length 828.5
  Bottom Layer w10: v1(866.14,649.61) JP1.2
NetJP2_2: JP2.2 SW2.1 | length 328
  Bottom Layer w10: v1(1118.77,1161.42) 1141.73,1184.38 JP2.2
NetJP3_2: JP3.2 SW3.1 | length 849.3
  Bottom Layer w10: v1(1371.39,649.61) 1417.32,695.54 JP3.2
NetJP4_2: JP4.2 SW4.1 | length 347
  Bottom Layer w10: v1(1624.02,1161.42) 1692.91,1230.31 JP4.2
NetJP5_2: JP5.2 SW5.1 | length 868.4
  Bottom Layer w10: v1(1876.64,649.61) 1968.5,741.47 JP5.2
NetJP6_2: JP6.2 SW6.1 | length 887.4
  Bottom Layer w10: JP6.2 2244.09,787.4 v1(2381.89,649.61)
NetJP7_2: JP7.2 SW7.1 | length 366.1
  Bottom Layer w10: JP7.2 2519.68,1276.25 v1(2634.51,1161.42)
NetJP8_2: JP8.2 SW8.1 | length 868.4
  Bottom Layer w10: JP8.2 2795.28,1437.01 2887.14,1345.14 v1(2887.14,649.61)
NetJP9_2: JP9.2 SW9.1 | length 347
  Bottom Layer w10: JP9.2 3070.87,1437.01 3139.76,1368.11 v1(3139.76,1161.42)
NetJP10_2: JP10.2 SW10.1 | length 849.3
  Bottom Layer w10: JP10.2 3346.46,1437.01 3392.39,1391.08 v1(3392.39,649.61)
NetJP11_2: JP11.2 SW11.1 | length 328
  Bottom Layer w10: JP11.2 3622.05,1437.01 3645.01,1414.04 v1(3645.01,1161.42)
NetJP12_2: JP12.2 SW12.1 | length 830.3
  Bottom Layer w10: v1(3897.64,649.61) JP12.2
NetR1_1: R1.1 R3.1 U2.A | length 509.8
  Top Layer w18: U2.A 1421.3,3610 1690,3610 1710,3590 1710,3556.69 R1.1 1712.7,3553.8 1712.7,3470.1 R3.1
NetR2_1: R2.1 R4.1 U2.B | length 392.3
  Top Layer w18: U2.B 1715.28,3674.72 1777.4,3612.6 R2.1 R4.1
NetR5_1: R5.1 U3.5 | length 83.3
  Top Layer w10: R5.1 910,4195 930,4175 U3.5
NetR7_1: R7.1 U3.4 | length 330.5
  Top Layer w10: R7.1 770,4220 795,4245 915,4245 930,4230 930,4210 937.52,4202.48 960.71,4202.48 U3.4
NetR11_2: R11.2 U4.2 | length 320.4
  Top Layer w10: U4.2 1060,3415 1035,3440 1035,3545 1107.6,3617.6 R11.2
NetR17_2: R17.2 R19.1 R20.1 U7.2 | length 447.5
  Top Layer w10: R19.1 3765,3527.4 3765,3500 3730,3465 3730,3365 3745,3350 U7.2 3855,3350 3867.6,3362.6 R17.2 3947.6,3362.6 3955,3370 R20.1
NetR21_1: R21.1 R22.2 U7.6 | length 195.7
  Top Layer w10: R21.1 R22.2 3552.4,3412.6 3565,3400 U7.6
NetR25_1: R25.1 R28.1 U7.5 | length 682.9
  Top Layer w10: U7.5 3565,3450 3555,3460 3555,3527.6 R25.1 3557.4,3572.4 3565,3580 3900,3580 3982.4,3497.6 R28.1
PAM8302_EN: U1.34 U5.1 | length 3527.9
  Top Layer w10: U1.34@1067.32,2850 1182.32,2735 2445,2735 2580,2870 2800,2870 2848.46,2821.54 2917.81,2821.54 2990,2893.73 2990,3415 3295,3720 3735,3720 3741.61,3726.61 U5.1@3741.61,3776.34
SW1: J1.1 JP1.1 U1.4 | length 1298.7
  Top Layer w10: U1.4@767.32,2110 767.32,2062.4 1077.76,1751.97 J1.1
  Bottom Layer w10: JP1.1 866.14,1594.49 1023.62,1751.97 J1.1
SW2: J1.2 JP2.1 U1.5 | length 1124.3
  Top Layer w10: U1.5@867.32,2110 867.32,2057.4 1115,1809.72 1367.05,1809.72 J1.2
  Bottom Layer w10: JP2.1 1141.73,1594.49 1181.1,1633.86 1306.69,1633.86 J1.2
SW3: J1.3 JP3.1 U1.6 | length 978
  Top Layer w10: U1.6@967.32,2110 967.32,2057.4 1175,1849.72 1427.05,1849.72 J1.3
  Bottom Layer w10: JP3.1 1417.32,1633.86 1456.69,1673.23 1456.69,1683.86 J1.3
SW4: J1.4 JP4.1 U1.7 | length 961.7
  Top Layer w10: U1.7@1067.32,2110 1067.32,2057.4 1230,1894.72 1440,1894.72 1520,1814.72 1562.05,1814.72 J1.4
  Bottom Layer w10: J1.4 1624.8,1701.97 1692.91,1633.86 JP4.1
SW5: J1.5 JP5.1 U1.9 | length 978.5
  Top Layer w10: U1.9@1267.32,2110 1267.32,2062.4 1390,1939.72 1445,1939.72 1535,1849.72 1627.05,1849.72 J1.5
  Bottom Layer w10: J1.5 1811.26,1665.52 1891.62,1665.52 1968.5,1588.63 JP5.1
SW6: J1.6 JP6.1 U1.10 | length 1151.7
  Top Layer w10: U1.10@1367.32,2110 1367.32,2072.4 1555,1884.72 1692.05,1884.72 J1.6
  Bottom Layer w10: J1.6 2086.61,1751.97 2244.09,1594.49 JP6.1
SW7: J2.1 JP7.1 U1.11 | length 2171.7
  Top Layer w10: U1.11@1467.32,2110 1467.32,2062.4 1585,1944.72 1720,1944.72 1912.76,1751.97 J2.1
  Bottom Layer w10: JP7.1 2519.68,1594.49 2677.17,1751.97 J2.1
SW8: J2.2 JP8.1 U1.12 | length 1993.2
  Top Layer w10: U1.12@1567.32,2110 1567.32,2067.4 1640,1994.72 1720,1994.72 1880,1834.72 2956.22,1834.72 J2.2
  Bottom Layer w10: JP8.1 2795.28,1594.49 2834.65,1633.86 2920.87,1633.86 J2.2
SW9: J2.3 JP9.1 U1.14 | length 1802.2
  Top Layer w10: U1.14@1767.32,2110 1767.32,2012.4 1905,1874.72 3016.22,1874.72 J2.3
  Bottom Layer w10: JP9.1 3070.87,1683.86 J2.3
SW10: J2.4 JP10.1 U1.15 | length 1818.5
  Top Layer w10: U1.15@1867.32,2110 1867.32,2012.4 1970,1909.72 3081.22,1909.72 J2.4
  Bottom Layer w10: J2.4 3238.98,1701.97 3346.46,1594.49 JP10.1
SW11: J2.5 JP11.1 U1.16 | length 1967.7
  Top Layer w10: U1.16@1967.32,2110 1967.32,2007.4 2020,1954.72 3136.22,1954.72 J2.5
  Bottom Layer w10: J2.5 3422.5,1668.44 3548.09,1668.44 3622.05,1594.49 JP11.1
SW12: J2.6 JP12.1 U1.17 | length 2163.5
  Top Layer w10: U1.17@2067.32,2110 2067.32,2012.4 2085,1994.72 3196.22,1994.72 J2.6
  Bottom Layer w10: J2.6 3779.53,1751.97 3897.64,1633.86 JP12.1
USB_D_N: U1.TP2
USB_D_P: U1.TP3
USB_VBUS: C4.2 C12.2 C13.2 C29.1 C31.1 C32.1 R5.2 R6.2 R29.1 U1.40 U3.6 U5.6 U6.8 U7.8 | length 8501.6
  Top Layer w10: R5.2 815,4192.4 815,4130.86 820.86,4125 857.6,4125 R6.2 902.6,4122.6 929.41,4149.41 U3.6@961.89,4149.41 ; v1(957.4,4017.6) C4.2 960,4062.6 960,4147.52 U3.6@961.89,4149.41 ; U3.6 U3.6@961.89,4149.41 ; v1(3585,3225) C32.1 3617.4,3298.11 U7.8 ; U6.8 3822.6,2806.89 C31.1 v1(3855,2880)
  Top Layer w18: v1(3530,3857.4) C13.2 C12.2 3762.4,3857.4 3792.8,3887.8 U5.6@3792.8,3943.66 ; C29.1 R29.1 v1(4287.4,3177.6)
  Bottom Layer w18: 3720,3520 3725,3515 3865,3515 3920,3460 3920,3250 3992.4,3177.6 v1(4287.4,3177.6)
  Bottom Layer w20: U1.40@467.32,2850 467.32,3112.68 430,3150 430,3895 505,3970 909.8,3970 v1(957.4,4017.6) 957.4,4162.4 1090.04,4295.04 3289.96,4295.04 3530,4055 v1(3530,3857.4) 3720,3667.4 3720,3520 3680,3480 3500,3480 3385,3365 3385,3260 3420,3225 v1(3585,3225) 3630,3180 3845,3180 4030,2995 4030,2965 3945,2880 v1(3855,2880)
VG: C29.2 C30.1 R21.2 R29.2 R30.1 U6.3 U6.5 U7.3 | length 2332.8
  Top Layer w10: v1(3425,3305) R21.2 ; v1(3565,2705) U6.3 ; U7.3 v1(3875,3400) ; U6.5 v1(3895,2655)
  Top Layer w20: C30.1 v1(4150,3072.5) C29.2 R29.2 R30.1
  Bottom Layer w20: v1(3425,3305) 3780,3305 v1(3875,3400) 3875,3220 4022.5,3072.5 v1(4150,3072.5) 4150,3000 3935,2785 3935,2695 v1(3895,2655) 3720,2655 3670,2705 v1(3565,2705)
pads on no net: J3.0 J4.0 J11.0 J11.2 J13.0 J13.2 J16.0 J16.2 R16. R26. U1.0 U1.30 U1.37 U1.39 U1.TP4 U1.TP5 U1.TP6 U2.3 U2.4 U4.1 U4.4 U4.7 U5.2

## Polygon pours and split planes (outlines as drawn)
GND on Bottom Layer "GND_L02_P001" (solid, remove dead copper, pour order 1): 395,4330 4330,4330 4330,2085 395,2085
GND on Top Layer "GND_L01_P000" (solid, remove dead copper, pour order 0): 395,4330 4330,4330 4330,2085 395,2085

## Silkscreen, mask and mechanical layers (free items; w line width, h text height)
Bottom Overlay:
  text "'.Codename' REV:'.HardRev' '.Print_Date'" at 1925,3145 h62
Mechanical 1:
  the board outline again, w7.87

## Text inside footprints (layer, text, board x,y; h text height)
M1: Top Overlay "JLCJLCJLCJLC" at 1484.85,2367.87 h33.46